# Altium PCB SFPextensionSplit.PcbDoc
Units mil, origin at the board's own origin, x right, y up, seen from the top; angles counter-clockwise.
Board outline 2540 x 1350 mil, 2 copper layers (Top Layer, Bottom Layer); 5 components, 15 nets, 75 pads, 15 vias.
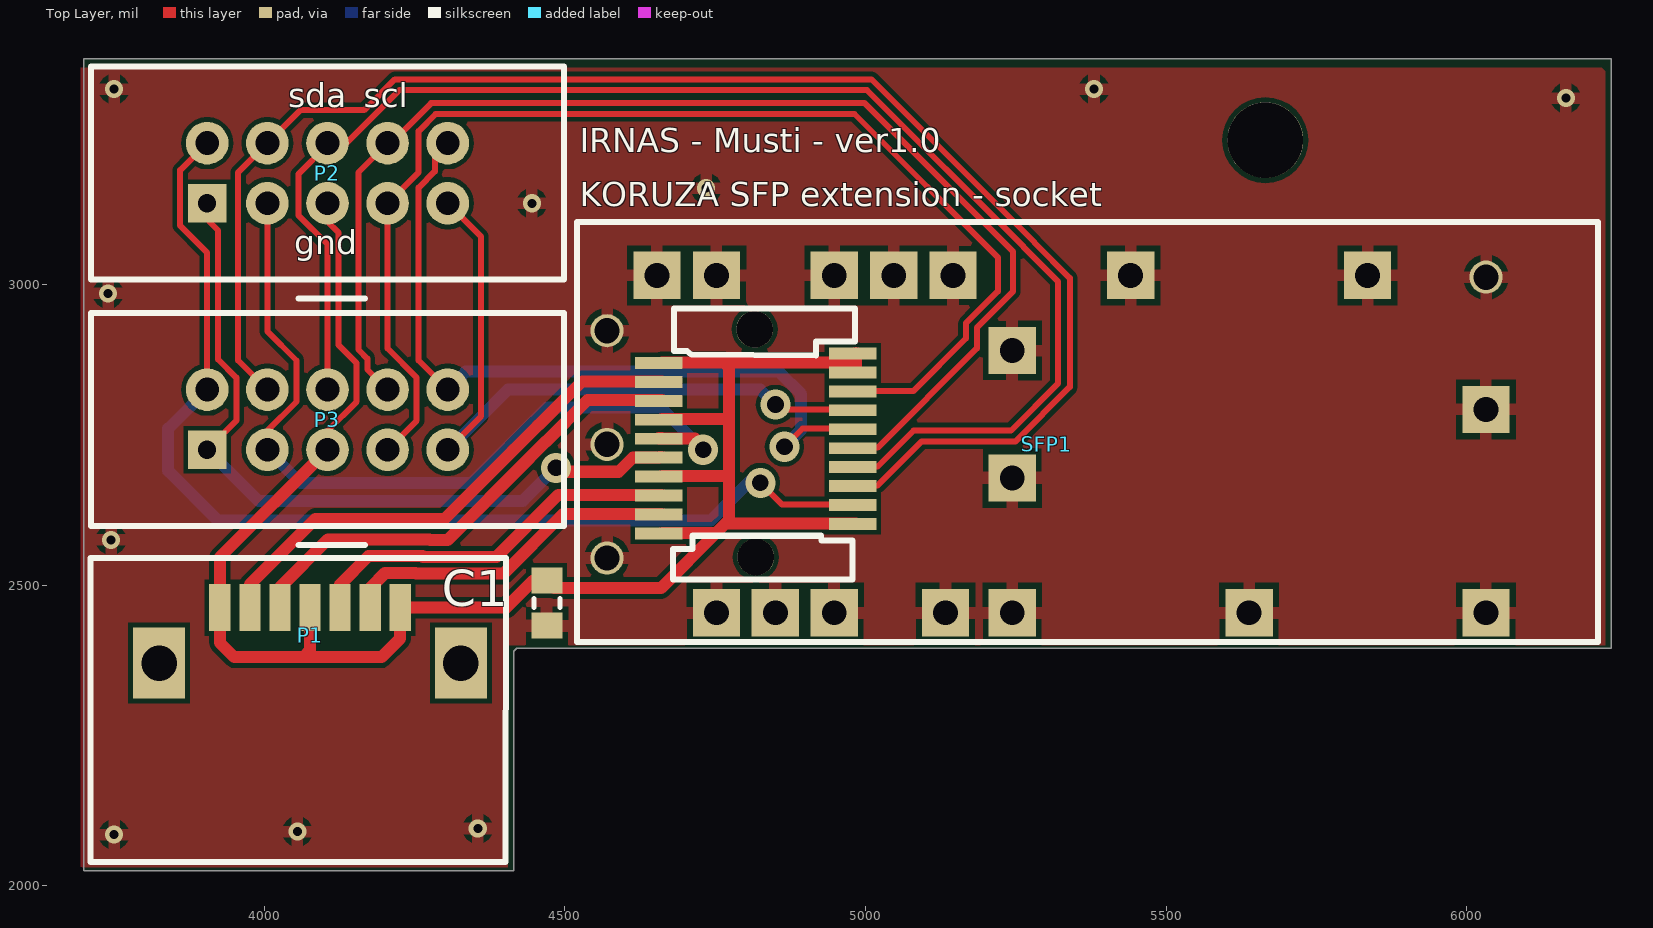
[diagram p0: Top Layer view]
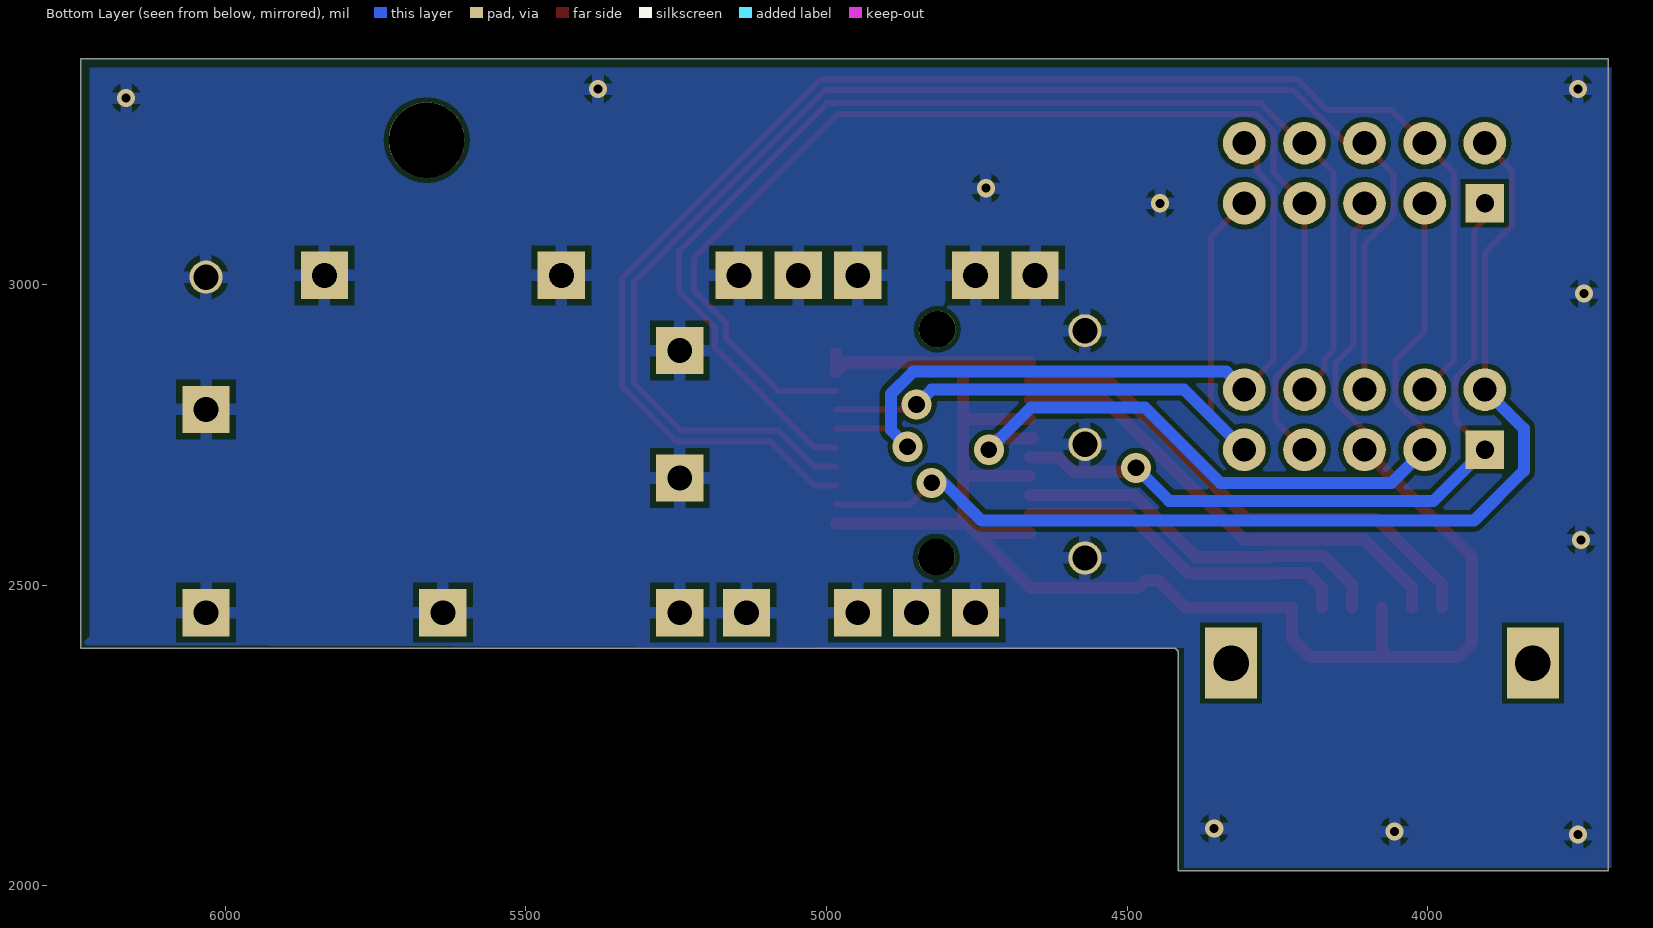
[diagram p1: Bottom Layer view, seen from below]

## Layer stack, top to bottom
Top Solder: solder mask 0.4, Solder Resist, Dk 3.5
Top Layer: signal copper 1.4
Dielectric1: dielectric 12.6, FR-4, Dk 4.8
Bottom Layer: signal copper 1.4
Bottom Solder: solder mask 0.4, Solder Resist, Dk 3.5

## Board outline
6240,3375 3700,3375 3700,2025 4415,2025 4415,2390 4420,2395 6240,2395

## Design rules (kind name [scope] priority, off if disabled: settings)
Clearance ClearanceEdge [All vs OnLayer('Keep-Out Layer')] p1: gap=4
Clearance [All] p2: gap=8
HoleSize [All] p1: absolutevalues=TRUE maxlimit=236.22 minlimit=11.81 maxpercent=80.000 minpercent=20.000
HoleToHoleClearance [All] p1: gap=5 allowstackedmicrovias=TRUE
MinimumAnnularRing [All] p1: minimumring=5.91
PolygonConnect [All] p1: connectstyle=Relief reliefconductorwidth=20 reliefentries=4 polygonreliefangle="90 Angle" airgapwidth=10
RoomDefinition SFPextensionSplit [InComponentClass('SFPextensionSplit')] p1: confinementstyle=ConfineIn formatcopy=TRUE lockcomponents=FALSE outline 3695,2020 6235,2020 6235,3380 3695,3380
RoutingVias [All] p1: holewidth=28 width=50 viastyle="Through Hole" minholewidth=28 minwidth=50 maxholewidth=28 maxwidth=50
SilkToSolderMaskClearance SilkscreenOverComponentPads [IsPad] p1: minsilkscreentomaskgap=10 clearancetoexposedcopper=TRUE
SolderMaskExpansion [All] p1: expansion=4
UnpouredPolygon [All] p1: allowunpoured=FALSE
Width [All] p1: maxlimit=20 minlimit=10 preferedwidth=10 minimp=50.000000 maximp=50.000000 favimp=50.000000
26 further rules are at their usual default settings.

## Components (designator, comment, footprint, x,y, rotation, side; value= is the part's Value field where it differs from the comment)
C1 "Capacitor" RESC2012X06N 4470,2470 r270 top
P1 "SATA" "SATA pcb" 3825,2370 r0 top
P2 "IDC10" IDC10 4105,3185 r90 top
P3 "IDC10" IDC10 4105,2775 r90 top
SFP1 "SFP connector" "SFP receptacle" 4570,2545 r90 top

## Footprints (in the part's own frame and the unit in brackets; to place one, negate y for a bottom-side part, rotate by r counter-clockwise, add the part's x,y. Pads: shape width x height; smd on the part's side, far side on the other; paste and mask are expansions set on the pad)
IDC10 [mm] "2.54mm header 2x5"
  rect 1.624x1.624 hole 0.762: 1(-1.27,5.08)
  round 1.8 hole 1.01: 2(1.27,5.08) 3(-1.27,2.54) 4(1.27,2.54) 5(-1.27,0) 6(1.27,0) 7(-1.27,-2.54) 8(1.27,-2.54) 9(-1.27,-5.08) 10(1.27,-5.08)
  silkscreen extent -5.3,-10 4.5,10
RESC2012X06N [mm] "Chip Resistor, 2-Leads, Body 2.0x1.2mm, IPC Medium Density"
  rect 1.1x1.3 smd: 1(-0.95,0) 2(0.95,0)
  silkscreen extent -0.2,-0.55 0.2,0.55, body extent -1.08,-0.62 1.07,0.63, height 0.6
"SATA pcb" [mm]
  rect 2.2x3 hole 1.5: 0(0,0) 0(12.75,0)
  rect 0.9x2 smd: 1(2.565,2.35) 2(3.835,2.35) 3(5.105,2.35) 4(6.375,2.35) 5(7.645,2.35) 6(8.915,2.35) 7(10.185,2.35)
  silkscreen extent -2.9,-8.4 14.65,4.45
"SFP receptacle" [mm]
  rect 0.5x2 smd: 1(1.439,-10.387) 2(2.239,-10.387) 3(3.039,-10.387) 4(3.839,-10.387) 5(4.639,-10.387) 6(5.439,-10.387) 7(6.239,-10.387) 8(7.039,-10.387) 9(7.839,-10.387) 10(8.639,-10.387) 11(8.239,-2.187) 12(7.439,-2.187) 13(6.639,-2.187) 14(5.839,-2.187) 15(5.039,-2.187) 16(4.239,-2.187) 17(3.439,-2.187) 18(2.639,-2.187) 19(1.839,-2.187) 20(1.039,-2.187)
  rect 2x2 hole 1.05: 21(-2.311,-7.112) 21(-2.311,-4.623) 21(-2.311,-14.3) 21(-2.311,-9.601) 21(-2.311,-17.12) 21(-2.311,-27.127) 21(-2.311,-37.135) 21(3.378,-17.12) 21(6.274,-37.135) 21(8.763,-17.12) 21(11.938,-9.601) 21(11.938,-4.623) 21(11.938,-2.108) 21(11.938,-32.131) 21(11.938,-22.123) 21(11.938,-14.616) 21(11.938,-12.116)
  round 1.4 hole 1.067: 21(0,0) 21(4.8,0) 21(9.601,0) 21(11.864,-37.137)
  round 1.55 hole 1.55: 35(9.664,-6.237) 36(0.039,-6.287)
  silkscreen extent -3.56,-41.86 14.2,1.27

## Part data
C1: "General capacitor"
P1: "sata"
P2 P3: "IDC 10pin"

## Free pads (board coordinates)
  round 125.98 hole 125.98 unplated: 0(5665,3240)

## Via types
v1: diameter 30, hole 15, Top Layer to Bottom Layer, tented both sides, 10 vias
v2: diameter 50, hole 28, Top Layer to Bottom Layer, tented both sides, 5 vias

## Nets (pads, with @x,y where several pads share a name; then routed paths per layer and width w, separated by ;. In a path a pad name is that pad's centre, name@x,y a point inside that pad or via, vN(x,y) a via of type N, cw(c..) or ccw(c..) an arc to the next point about the centre after c; other vN are vias at no path point)
GND: C1.1 P1.1 P1.4 P1.7 P2.5 P3.5 SFP1.1 SFP1.9 SFP1.10 SFP1.11 SFP1.14 SFP1.17 SFP1.20 | length 3065.8
  Top Layer w10: P3.5 4105,2756.51 4153.43,2804.94 4153.43,2869.11 4123,2899.54 4123,3086.57 4105,3104.57 P2.5
  Top Layer w20: P1.4 4075.98,2390.98 4065,2380 ; P3.5 3925.98,2545.98 P1.1 3925.98,2404.02 3950,2380 4065,2380 ; SFP1.20@4661.1,2586.89 4751.89,2586.89 ; SFP1.17@4661.1,2681.38 4768.62,2681.38 ; SFP1.14@4661.1,2775.87 4765.87,2775.87 ; SFP1.11@4661.1,2870.35 4764.65,2870.35 4773,2862 4773,2608 4767.64,2602.64 ; 4770,2870 4969.61,2870 SFP1.9@4983.94,2855.67 ; SFP1.1@4983.94,2602.64 4767.64,2602.64 ; SFP1.9@4983.94,2854.61 4985,2855.67 SFP1.9@4983.94,2855.67 ; SFP1.10@4983.94,2886.1 SFP1.9@4983.94,2855.67 ; 4065,2380 4195,2380 4225.98,2410.98 P1.7 4402.52,2462.52 4447.4,2507.4 C1.1 4482.4,2495 4660,2495 4751.89,2586.89 ; 4751.89,2586.89 4767.64,2602.64
LOS: P2.7 P3.7 SFP1.8 | length 2041.4
  Top Layer w10: P3.7 4253.43,2773.43 4253.43,2845.06 4205,2893.49 P2.7 4256.57,3186.57 4256.57,3255.06 4284.94,3283.43 4981.57,3283.43 5220,3045 5220,2988.58 5167,2935.58 5167,2910.11 5080,2823.11 SFP1.8@4983.94,2823.11
MOD_DEF0: P2.10 P3.10 SFP1.6 | length 1296.8
  Top Layer w10: P3.10 4256.57,2873.43 4256.57,3161.11 4283.48,3188.02 4283.48,3213.48 P2.10 ; v2(4865,2730) 4895.12,2760.12 SFP1.6@4983.94,2760.12
  Bottom Layer w20: P3.10 4335,2855 4855.81,2855 4893,2817.81 4893,2758 v2(4865,2730)
MOD_DEF1: P2.8 P3.8 SFP1.5 | length 2075.4
  Top Layer w10: P3.8 4171.43,2858.57 4171.43,2876.57 4156.57,2891.43 4156.57,3186.57 P2.8 4211.05,3235 4277.48,3301.43 4998.57,3301.43 5245,3055 5245,2988.12 5185,2928.12 5185,2893.58 5020.04,2728.62 SFP1.5@4983.94,2728.62
MOD_DEF2: P2.6 P3.6 SFP1.4 | length 2396.7
  Top Layer w10: P3.6 4105,3066.51 4056.57,3114.94 4056.57,3183.43 4105,3231.87 P2.6 4136.51,3235 4224.51,3323 5002.46,3323 5263,3062.46 5263,3062 5320,3005 5320,2835 5242.09,2757.09 5080,2757.09 5020.04,2697.13 SFP1.4@4983.94,2697.13
NetC1_2: C1.2 SFP1.21
  other v1: 3750,2085 4055,2090 4355,2095 3745,2575 3740,2985 4445,3135 4735,3160 6165,3310 3750,3325 5380,3325
NetP1_2: P1.2 SFP1.12 | length 863.8
  Top Layer w20: P1.2 3975.98,2500.98 4085,2610 4300,2610 4414,2724 4414,2724.41 4455.59,2766 4456,2766 4528.86,2838.86 SFP1.12@4661.1,2838.86
NetP1_3: P1.3 SFP1.13 | length 798.8
  Top Layer w20: P1.3 4025.98,2495.98 4105.89,2575.89 4274.35,2575.89 4275.24,2575 4305,2575 4442,2712 4442,2712.81 4467.19,2738 4468,2738 4537.36,2807.36 SFP1.13@4661.1,2807.36
NetP1_5: P1.5 SFP1.18 | length 636
  Top Layer w20: P1.5 4125.98,2500.98 4172.89,2547.89 4262.75,2547.89 4263.64,2547 4386.2,2547 4489.08,2649.88 SFP1.18@4661.1,2649.88
NetP1_6: P1.6 SFP1.19 | length 569.5
  Top Layer w20: P1.6 4175.98,2495.06 4200.81,2519.89 4251.16,2519.89 4252.05,2519 4397.79,2519 4497.18,2618.39 SFP1.19@4661.1,2618.39
RATE_SEL: P2.9 P3.9 SFP1.7 | length 1189.8
  Top Layer w10: P3.9 4360,2780 4360,3080 P2.9 ; v2(4850,2800) 4858.39,2791.61 SFP1.7@4983.94,2791.61
  Bottom Layer w20: P3.9 4405,2825 4825,2825 v2(4850,2800)
TX_DISABLE: P2.4 P3.4 SFP1.3 | length 2571.1
  Top Layer w10: P3.4 3956.57,2873.43 3956.57,3186.57 P2.4 4060,3290 4166.05,3290 4217.05,3341 5009.91,3341 5281,3069.91 5281,3069.46 5340,3010.46 5340,2829.54 5249.54,2739.09 5093.5,2739.09 5020.04,2665.63 SFP1.3@4983.94,2665.63
TX_FAULT: P2.2 P3.2 SFP1.2 | length 1836.7
  Top Layer w10: P3.2 3905,3052.68 3860.03,3097.65 3860.03,3190.03 P2.2 ; v2(4825,2670) 4860.87,2634.13 SFP1.2@4983.94,2634.13
  Bottom Layer w20: P3.2 3840,2760 3840,2690 3923,2607 4742,2607 4815,2680 v2(4825,2670)
VCCR: P2.3 P3.3 SFP1.15 | length 1368.1
  Top Layer w10: P3.3 4005,2756.51 4053.43,2804.94 4053.43,2873.43 4005,2921.87 P2.3
  Top Layer w20: SFP1.15 4716.63,2743.37 4730,2730 v2(4730,2725) ; SFP1.15@4656.1,2744.37 SFP1.15@4661.1,2744.37
  Bottom Layer w20: P3.3 4060,2670 4345,2670 4470,2795 4660,2795 v2(4730,2725)
VCCT: P2.1 P3.1 SFP1.16 | length 1276.7
  Top Layer w10: P3.1 3953.43,2773.43 3953.43,2845.06 3923,2875.49 3923,3090.03 3905,3108.03 P2.1
  Top Layer w20: v2(4485,2695) 4491.58,2688.42 4589.47,2688.42 4612.93,2711.87 SFP1.16 ; SFP1.16@4656.1,2712.87 SFP1.16@4661.1,2712.87
  Bottom Layer w20: P3.1 3990,2640 4430,2640 v2(4485,2695)
pads on no net: P1.0 SFP1.35 SFP1.36

## Polygon pours and split planes (outlines as drawn)
NetC1_2 on Bottom Layer "Top Layer-No Net" (solid, pour order 8): 6225,3360 3695,3360 3695,2030 4645,2030 4405,2024.78 4405,2394.97 6230,2400 6235,2405 6225,2415
NetC1_2 on Top Layer "Top Layer-No Net" (solid, pour order 4): 3695,3360 6224.76,3360 6230,3354.81 6230,2400 4405,2400 4405,2030.19 3700.24,2030.19 3695,2025

## Silkscreen, mask and mechanical layers (free items; w line width, h text height)
Top Overlay:
  text "sda" at 4040,3295 h40
  text "scl" at 4165,3295 h40
  text "IRNAS - Musti - ver1.0" at 4525,3220 h40
  text "KORUZA SFP extension - socket" at 4525,3130 h40
  text "gnd" at 4050,3050 h40
Mechanical 3:
  lines w15.75: 3820,3375 3805,3375 ; 3805,3375 3695,3375 3695,2025 3800,2025 4415,2025 4415,2390 6240,2390 6240,3375 3805,3375